# Altium PCB EDA-03517-V1-0_misc1.pcbdoc
Units mm, origin at the board's own origin, x right, y up, seen from the top; angles counter-clockwise.
Board outline 144 x 132 mm, 2 copper layers (Top Layer, Bottom Layer), stack 2.47 mm thick; 135 components, 0 nets, 152 pads, 0 vias.
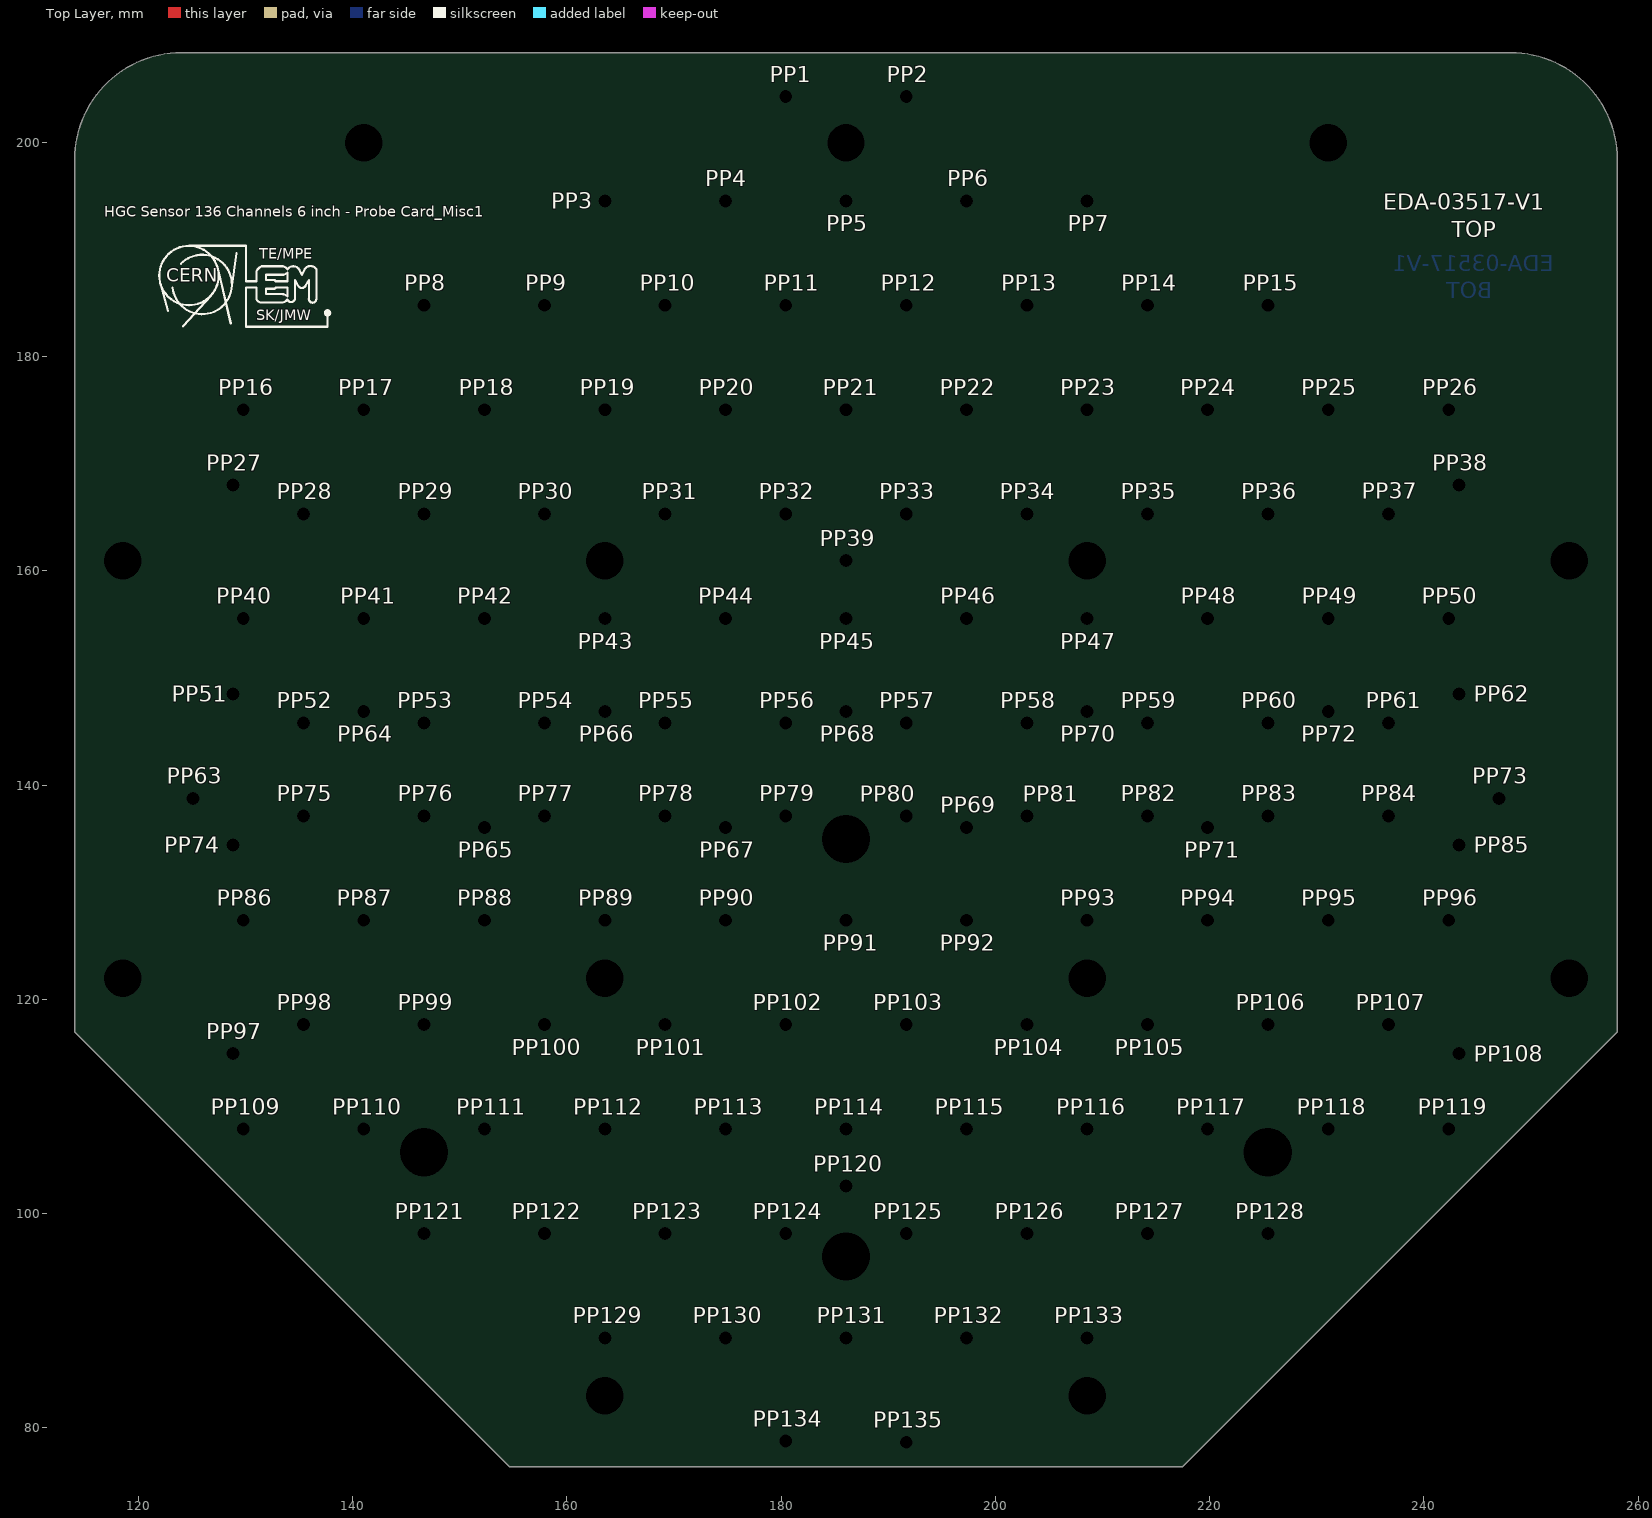
[diagram p0: Top Layer view]
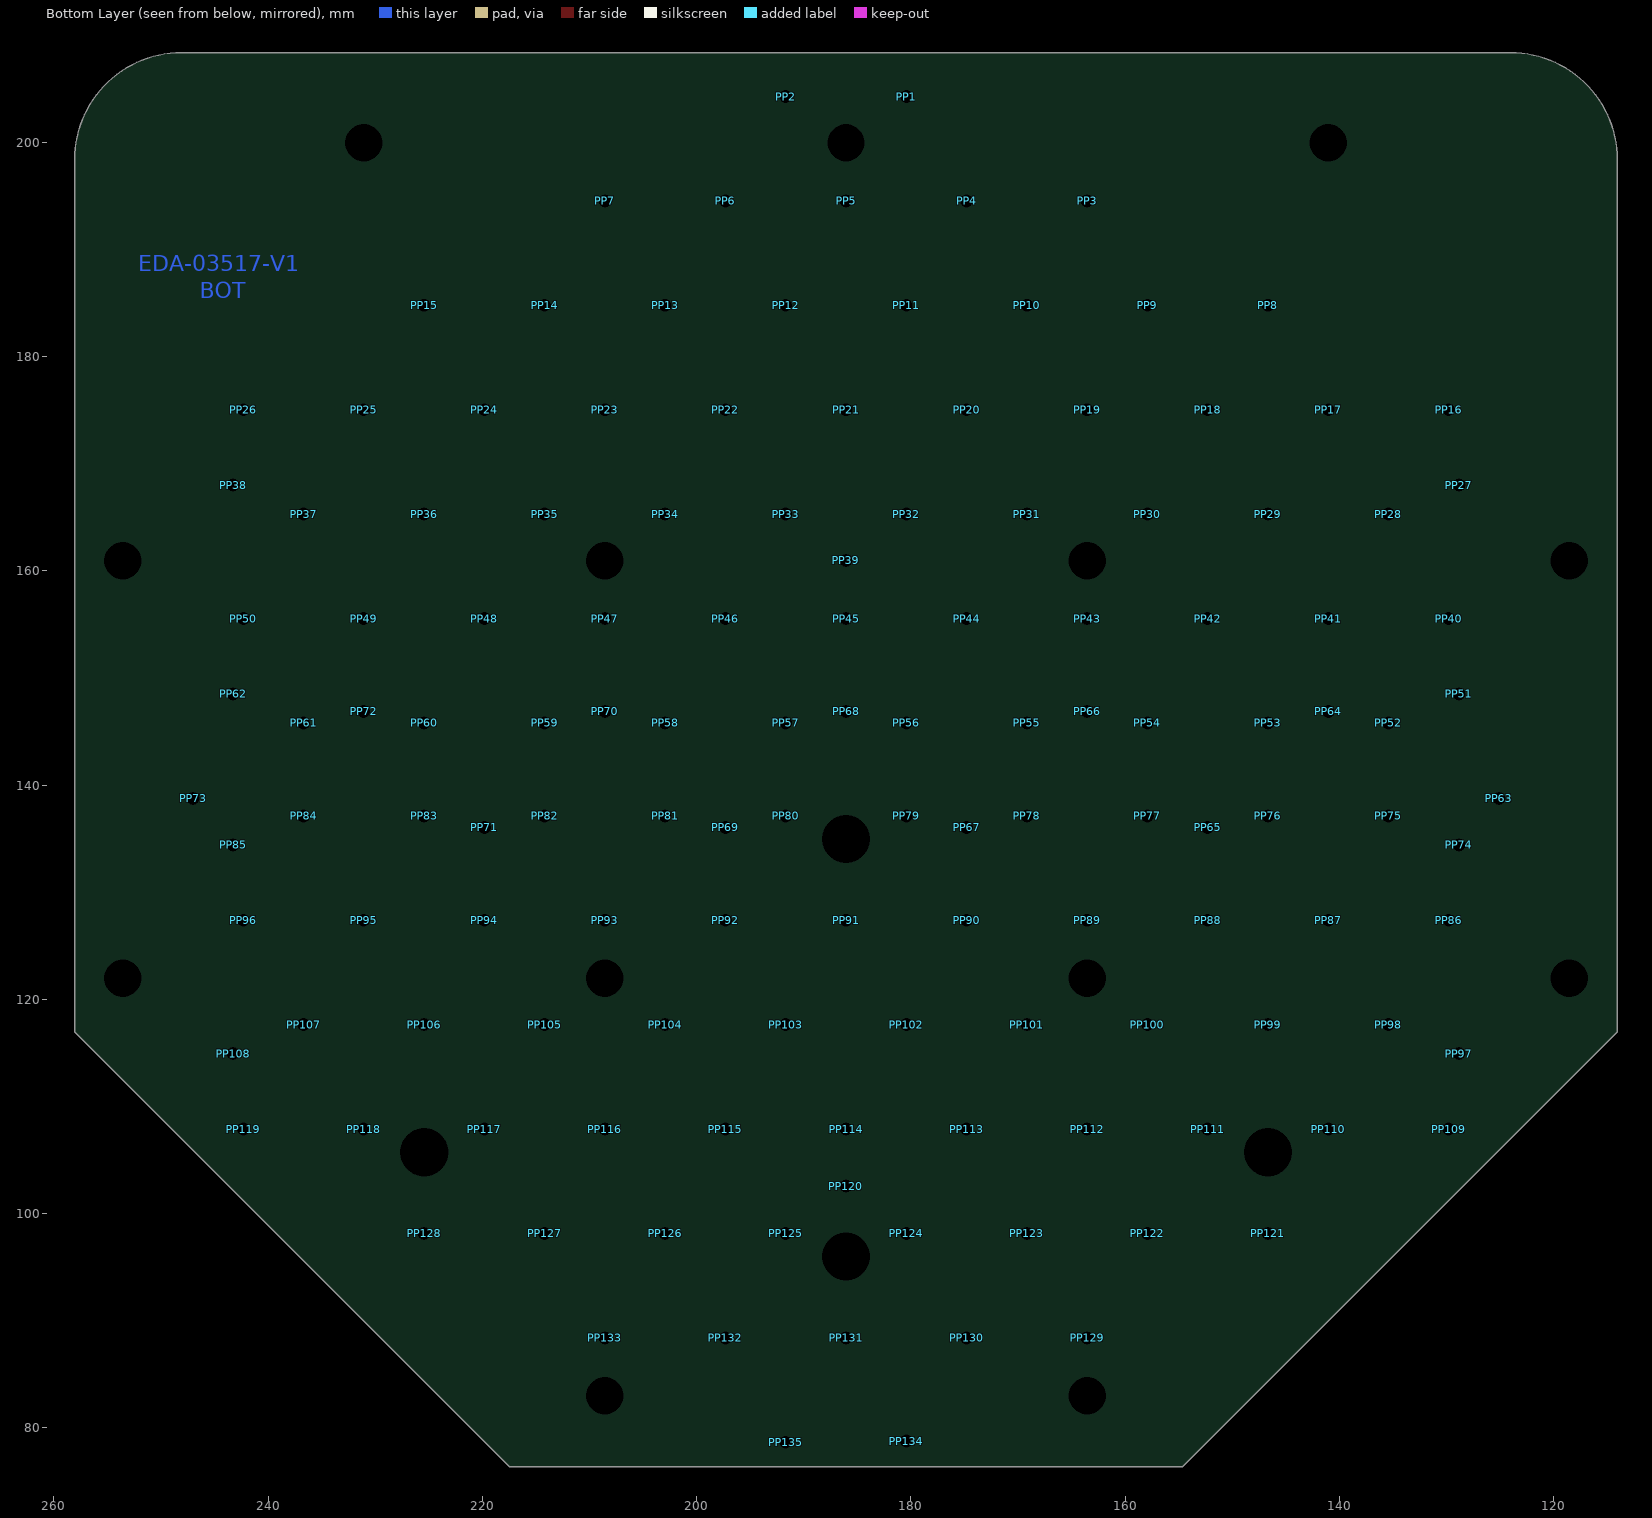
[diagram p1: Bottom Layer view, seen from below]

## Layer stack, top to bottom
Top Solder: solder mask 0.01, Solder Resist, Dk 3.5
Top Layer: signal copper 0.035
Dielectric 1: core 2.4, FR-4, Dk 4.5
Bottom Layer: signal copper 0.035
Bottom Solder: solder mask 0.01, Solder Resist, Dk 3.5

## Board outline
114.055,116.96 114.055,198.36 cw(c124.055,198.36) 124.055,208.36 248.055,208.36 cw(c248.055,198.36) 258.055,198.36 258.055,116.96 217.455,76.36 154.655,76.36

## Design rules (kind name [scope] priority, off if disabled: settings)
Clearance [All] p1: gap=0.3 ignorepadtopadclearanceinfootprint=FALSE
ComponentClearance ComponentClearance_Overlapping [InComponentClass('Overlapping') or InComponentClass('NotMounted') vs InComponentClass('Overlapping')] p1: gap=0 collisioncheckmode=3 verticalgap=0 showdistances=FALSE
ComponentClearance [not InComponentClass('Overlapping')] p2: gap=0.2 collisioncheckmode=3 verticalgap=0.2 showdistances=FALSE
DiffPairsRouting [All] p1: maxlimit=0.457 minlimit=0.457 mostfreqgap=0.457 toplayer_minwidth=0.229 toplayer_maxwidth=0.229 toplayer_prefwidth=0.229 bottomlayer_minwidth=0.229 bottomlayer_maxwidth=0.229 bottomlayer_prefwidth=0.229 maxuncoupledlength=2.54
FabricationTestPointUsage TestPointUsage [All] p1: valid=0 allowmultiple=FALSE
FabricationTestpoint Testpoint [All] p1: side=3 testpointundercomponent=TRUE minsize=1.016 maxsize=2.54 preferedsize=1.524 minholesize=0 maxholesize=1.016 preferedholesize=0.813 testpointgrid=0.025 allowsidetop=TRUE allowsidebottom=TRUE usegrid=TRUE gridtolerance=0
Height [All] p1: minheight=0 maxheight=25 prefheight=10
HoleSize [All] p1: absolutevalues=TRUE maxlimit=5 minlimit=0.4 maxpercent=80.000 minpercent=20.000
HoleToHoleClearance [All] p1: gap=0.2 allowstackedmicrovias=TRUE
MinimumSolderMaskSliver [All] p1: minsoldermaskwidth=0.35
PermittedLayers [All] p1: toplayerpermitted=TRUE bottomlayerpermitted=FALSE
PlaneClearance [All] p1: clearance=0.5
PlaneConnect PlaneConnect_Direct [InPadClass('Mounting') or IsVia] p1: planeconnectstyle=Direct reliefexpansion=0.508 reliefentries=4 reliefconductorwidth=0.254 reliefairgap=0.254
PlaneConnect [All] p2: planeconnectstyle=Relief reliefexpansion=0.3 reliefentries=4 reliefconductorwidth=0.5 reliefairgap=0.2
PolygonConnect PolygonConnect_Direct [InPadClass('Mounting') or IsVia] p1: connectstyle=Direct reliefconductorwidth=0.254 reliefentries=4 polygonreliefangle="90 Angle" airgapwidth=0.254
PolygonConnect [All] p2: connectstyle=Relief reliefconductorwidth=0.5 reliefentries=4 polygonreliefangle="90 Angle" airgapwidth=0.2
RoomDefinition ProbeCard_misc1 [InComponentClass('ProbeCard_misc1')] p1: confinementstyle=ConfineIn formatcopy=TRUE lockcomponents=FALSE outline 123.825,77.47 248.285,77.47 248.285,205.105 123.825,205.105
RoutingVias RoutingVias_NoNet [Not IsElectrical] p1: holewidth=0 width=0 viastyle="Through Hole" minholewidth=0 minwidth=0 maxholewidth=0 maxwidth=0
RoutingVias [All] p2: holewidth=0.5 width=1 viastyle="Through Hole" minholewidth=0.5 minwidth=1 maxholewidth=0.5 maxwidth=1
ShortCircuit ShortCircuit_NetTie [InNet('GND') vs InNet('VSS')or InNet('CGND')] p1: allowed=TRUE
ShortCircuit [All] p2: allowed=FALSE
SilkToSilkClearance [All] p1: silktosilkclearance=0.2
SilkToSolderMaskClearance SilkToSolderMaskClearanceVias [IsVia vs IsText] p1: minsilkscreentomaskgap=0 clearancetoexposedcopper=TRUE
SilkToSolderMaskClearance SilkscreenOverComponentPads [IsPad] p2: minsilkscreentomaskgap=0.225 clearancetoexposedcopper=TRUE
SolderMaskExpansion [All] p1: expansion=0
ViasUnderSMD [Not HasFootprint('Net Tie')] p1: allowed=FALSE
Width [All] p1: maxlimit=2.54 minlimit=0.305 preferedwidth=0.305
17 further rules are at their usual default settings.

## Classes and differential pairs
pad class Mounting: Free-D350NP Free-P450NP

## Components (designator, comment, footprint, x,y, rotation, side; value= is the part's Value field where it differs from the comment)
PP1 "Non Plated Hole" MTG120 180.429,204.261 r0 bottom
PP2 "Non Plated Hole" MTG120 191.681,204.261 r0 bottom
PP3 "Non Plated Hole" MTG120 163.551,194.516 r0 bottom
PP4 "Non Plated Hole" MTG120 174.803,194.516 r0 bottom
PP5 "Non Plated Hole" MTG120 186.055,194.516 r0 bottom
PP6 "Non Plated Hole" MTG120 197.307,194.516 r0 bottom
PP7 "Non Plated Hole" MTG120 208.559,194.516 r0 bottom
PP8 "Non Plated Hole" MTG120 146.673,184.772 r0 bottom
PP9 "Non Plated Hole" MTG120 157.925,184.772 r0 bottom
PP10 "Non Plated Hole" MTG120 169.177,184.772 r0 bottom
PP11 "Non Plated Hole" MTG120 180.429,184.772 r0 bottom
PP12 "Non Plated Hole" MTG120 191.681,184.772 r0 bottom
PP13 "Non Plated Hole" MTG120 202.933,184.772 r0 bottom
PP14 "Non Plated Hole" MTG120 214.185,184.772 r0 bottom
PP15 "Non Plated Hole" MTG120 225.437,184.772 r0 bottom
PP16 "Non Plated Hole" MTG120 129.795,175.027 r0 bottom
PP17 "Non Plated Hole" MTG120 141.047,175.027 r0 bottom
PP18 "Non Plated Hole" MTG120 152.299,175.027 r0 bottom
PP19 "Non Plated Hole" MTG120 163.551,175.027 r0 bottom
PP20 "Non Plated Hole" MTG120 174.803,175.027 r0 bottom
PP21 "Non Plated Hole" MTG120 186.055,175.027 r0 bottom
PP22 "Non Plated Hole" MTG120 197.307,175.027 r0 bottom
PP23 "Non Plated Hole" MTG120 208.559,175.027 r0 bottom
PP24 "Non Plated Hole" MTG120 219.811,175.027 r0 bottom
PP25 "Non Plated Hole" MTG120 231.063,175.027 r0 bottom
PP26 "Non Plated Hole" MTG120 242.315,175.027 r0 bottom
PP27 "Non Plated Hole" MTG120 128.852,167.986 r0 bottom
PP28 "Non Plated Hole" MTG120 135.421,165.283 r0 bottom
PP29 "Non Plated Hole" MTG120 146.673,165.283 r0 bottom
PP30 "Non Plated Hole" MTG120 157.925,165.283 r0 bottom
PP31 "Non Plated Hole" MTG120 169.177,165.283 r0 bottom
PP32 "Non Plated Hole" MTG120 180.429,165.283 r0 bottom
PP33 "Non Plated Hole" MTG120 191.681,165.283 r0 bottom
PP34 "Non Plated Hole" MTG120 202.933,165.283 r0 bottom
PP35 "Non Plated Hole" MTG120 214.185,165.283 r0 bottom
PP36 "Non Plated Hole" MTG120 225.437,165.283 r0 bottom
PP37 "Non Plated Hole" MTG120 236.689,165.283 r0 bottom
PP38 "Non Plated Hole" MTG120 243.258,167.986 r0 bottom
PP39 "Non Plated Hole" MTG120 186.055,160.96 r0 bottom
PP40 "Non Plated Hole" MTG120 129.795,155.538 r0 bottom
PP41 "Non Plated Hole" MTG120 141.047,155.538 r0 bottom
PP42 "Non Plated Hole" MTG120 152.299,155.538 r0 bottom
PP43 "Non Plated Hole" MTG120 163.551,155.538 r0 bottom
PP44 "Non Plated Hole" MTG120 174.803,155.538 r0 bottom
PP45 "Non Plated Hole" MTG120 186.055,155.538 r0 bottom
PP46 "Non Plated Hole" MTG120 197.307,155.538 r0 bottom
PP47 "Non Plated Hole" MTG120 208.559,155.538 r0 bottom
PP48 "Non Plated Hole" MTG120 219.811,155.538 r0 bottom
PP49 "Non Plated Hole" MTG120 231.063,155.538 r0 bottom
PP50 "Non Plated Hole" MTG120 242.315,155.538 r0 bottom
PP51 "Non Plated Hole" MTG120 128.852,148.497 r0 bottom
PP52 "Non Plated Hole" MTG120 135.421,145.794 r0 bottom
PP53 "Non Plated Hole" MTG120 146.673,145.794 r0 bottom
PP54 "Non Plated Hole" MTG120 157.925,145.794 r0 bottom
PP55 "Non Plated Hole" MTG120 169.177,145.794 r0 bottom
PP56 "Non Plated Hole" MTG120 180.429,145.794 r0 bottom
PP57 "Non Plated Hole" MTG120 191.681,145.794 r0 bottom
PP58 "Non Plated Hole" MTG120 202.933,145.794 r0 bottom
PP59 "Non Plated Hole" MTG120 214.185,145.794 r0 bottom
PP60 "Non Plated Hole" MTG120 225.437,145.794 r0 bottom
PP61 "Non Plated Hole" MTG120 236.689,145.794 r0 bottom
PP62 "Non Plated Hole" MTG120 243.258,148.497 r0 bottom
PP63 "Non Plated Hole" MTG120 125.112,138.753 r0 bottom
PP64 "Non Plated Hole" MTG120 141.047,146.864 r0 bottom
PP65 "Non Plated Hole" MTG120 152.299,136.049 r0 bottom
PP66 "Non Plated Hole" MTG120 163.551,146.864 r0 bottom
PP67 "Non Plated Hole" MTG120 174.803,136.049 r0 bottom
PP68 "Non Plated Hole" MTG120 186.055,146.864 r0 bottom
PP69 "Non Plated Hole" MTG120 197.307,136.049 r0 bottom
PP70 "Non Plated Hole" MTG120 208.559,146.864 r0 bottom
PP71 "Non Plated Hole" MTG120 219.811,136.049 r0 bottom
PP72 "Non Plated Hole" MTG120 231.063,146.864 r0 bottom
PP73 "Non Plated Hole" MTG120 246.998,138.753 r0 bottom
PP74 "Non Plated Hole" MTG120 128.852,134.415 r0 bottom
PP75 "Non Plated Hole" MTG120 135.421,137.119 r0 bottom
PP76 "Non Plated Hole" MTG120 146.673,137.119 r0 bottom
PP77 "Non Plated Hole" MTG120 157.925,137.119 r0 bottom
PP78 "Non Plated Hole" MTG120 169.177,137.119 r0 bottom
PP79 "Non Plated Hole" MTG120 180.429,137.119 r0 bottom
PP80 "Non Plated Hole" MTG120 191.681,137.119 r0 bottom
PP81 "Non Plated Hole" MTG120 202.933,137.119 r0 bottom
PP82 "Non Plated Hole" MTG120 214.185,137.119 r0 bottom
PP83 "Non Plated Hole" MTG120 225.437,137.119 r0 bottom
PP84 "Non Plated Hole" MTG120 236.689,137.119 r0 bottom
PP85 "Non Plated Hole" MTG120 243.258,134.415 r0 bottom
PP86 "Non Plated Hole" MTG120 129.795,127.375 r0 bottom
PP87 "Non Plated Hole" MTG120 141.047,127.375 r0 bottom
PP88 "Non Plated Hole" MTG120 152.299,127.375 r0 bottom
PP89 "Non Plated Hole" MTG120 163.551,127.375 r0 bottom
PP90 "Non Plated Hole" MTG120 174.803,127.375 r0 bottom
PP91 "Non Plated Hole" MTG120 186.055,127.375 r0 bottom
PP92 "Non Plated Hole" MTG120 197.307,127.375 r0 bottom
PP93 "Non Plated Hole" MTG120 208.559,127.375 r0 bottom
PP94 "Non Plated Hole" MTG120 219.811,127.375 r0 bottom
PP95 "Non Plated Hole" MTG120 231.063,127.375 r0 bottom
PP96 "Non Plated Hole" MTG120 242.315,127.375 r0 bottom
PP97 "Non Plated Hole" MTG120 128.852,114.926 r0 bottom
PP98 "Non Plated Hole" MTG120 135.421,117.63 r0 bottom
PP99 "Non Plated Hole" MTG120 146.673,117.63 r0 bottom
PP100 "Non Plated Hole" MTG120 157.925,117.63 r0 bottom
PP101 "Non Plated Hole" MTG120 169.177,117.63 r0 bottom
PP102 "Non Plated Hole" MTG120 180.429,117.63 r0 bottom
PP103 "Non Plated Hole" MTG120 191.681,117.63 r0 bottom
PP104 "Non Plated Hole" MTG120 202.933,117.63 r0 bottom
PP105 "Non Plated Hole" MTG120 214.185,117.63 r0 bottom
PP106 "Non Plated Hole" MTG120 225.437,117.63 r0 bottom
PP107 "Non Plated Hole" MTG120 236.689,117.63 r0 bottom
PP108 "Non Plated Hole" MTG120 243.258,114.926 r0 bottom
PP109 "Non Plated Hole" MTG120 129.795,107.886 r0 bottom
PP110 "Non Plated Hole" MTG120 141.047,107.886 r0 bottom
PP111 "Non Plated Hole" MTG120 152.299,107.886 r0 bottom
PP112 "Non Plated Hole" MTG120 163.551,107.886 r0 bottom
PP113 "Non Plated Hole" MTG120 174.803,107.886 r0 bottom
PP114 "Non Plated Hole" MTG120 186.055,107.886 r0 bottom
PP115 "Non Plated Hole" MTG120 197.307,107.886 r0 bottom
PP116 "Non Plated Hole" MTG120 208.559,107.886 r0 bottom
PP117 "Non Plated Hole" MTG120 219.811,107.886 r0 bottom
PP118 "Non Plated Hole" MTG120 231.063,107.886 r0 bottom
PP119 "Non Plated Hole" MTG120 242.315,107.886 r0 bottom
PP120 "Non Plated Hole" MTG120 186.055,102.56 r0 bottom
PP121 "Non Plated Hole" MTG120 146.673,98.141 r0 bottom
PP122 "Non Plated Hole" MTG120 157.925,98.141 r0 bottom
PP123 "Non Plated Hole" MTG120 169.177,98.141 r0 bottom
PP124 "Non Plated Hole" MTG120 180.429,98.141 r0 bottom
PP125 "Non Plated Hole" MTG120 191.681,98.141 r0 bottom
PP126 "Non Plated Hole" MTG120 202.933,98.141 r0 bottom
PP127 "Non Plated Hole" MTG120 214.185,98.141 r0 bottom
PP128 "Non Plated Hole" MTG120 225.437,98.141 r0 bottom
PP129 "Non Plated Hole" MTG120 163.551,88.397 r0 bottom
PP130 "Non Plated Hole" MTG120 174.803,88.397 r0 bottom
PP131 "Non Plated Hole" MTG120 186.055,88.397 r0 bottom
PP132 "Non Plated Hole" MTG120 197.307,88.397 r0 bottom
PP133 "Non Plated Hole" MTG120 208.559,88.397 r0 bottom
PP134 "Non Plated Hole" MTG120 180.435,78.76 r0 bottom
PP135 "Non Plated Hole" MTG120 191.681,78.652 r0 bottom

## Footprints (in the part's own frame and the unit in brackets; to place one, negate y for a bottom-side part, rotate by r counter-clockwise, add the part's x,y. Pads: shape width x height; smd on the part's side, far side on the other; paste and mask are expansions set on the pad)
MTG120 [mm] "Non Plated Through Hole: Hole Dia.=1.2mm"
  round 0.5 hole 1.2 unplated mask+0.35: 1(0,0)

## Part data
PP1 PP2 PP3 PP4 PP5 PP6 PP7 PP8 PP9 PP10 PP11 PP12 PP13 PP14 PP15 PP16 PP17 PP18 PP19 PP20 PP21 PP22 PP23 PP24 PP25 PP26 PP27 PP28 PP29 PP30 PP31 PP32 PP33 PP34 PP35 PP36 PP37 PP38 PP39 PP40 PP41 PP42 PP43 PP44 PP45 PP46 PP47 PP48 PP49 PP50 PP51 PP52 PP53 PP54 PP55 PP56 PP57 PP58 PP59 PP60 PP61 PP62 PP63 PP64 PP65 PP66 PP67 PP68 PP69 PP70 PP71 PP72 PP73 PP74 PP75 PP76 PP77 PP78 PP79 PP80 PP81 PP82 PP83 PP84 PP85 PP86 PP87 PP88 PP89 PP90 PP91 PP92 PP93 PP94 PP95 PP96 PP97 PP98 PP99 PP100 PP101 PP102 PP103 PP104 PP105 PP106 PP107 PP108 PP109 PP110 PP111 PP112 PP113 PP114 PP115 PP116 PP117 PP118 PP119 PP120 PP121 PP122 PP123 PP124 PP125 PP126 PP127 PP128 PP129 PP130 PP131 PP132 PP133 PP134 PP135: library part NON-PLATED_HOLE1.2, "Single Terminal Socket", Author="CERN DEM JMW", ComponentHeight=0mm, Component Type="Standard (No BOM)", CreateDate=28/11/2016, Family="Non Plated Hole", HelpURL=Undefined, LatestRevisionDate=28/11/2016, Mounted=No, PackageDescription="Non Plated Through Hole: Hole Dia.=1.2mm", Part Description="Non Plated Through Hole: Hole Dia.=1.2mm", Part Number=NON-PLATED_HOLE1.2, Pin Count=1, Sense=No, SMD=No, Socket=No, Status=None

## Free pads (board coordinates)
  round 1 hole 3.5 unplated mask+1.25: D350NP(118.543,121.967) D350NP(118.543,160.945) D350NP(141.047,199.923) D350NP(163.551,82.989) D350NP(163.551,121.967) D350NP(163.551,160.945) D350NP(186.055,199.923) D350NP(208.559,82.989) D350NP(208.559,121.967) D350NP(208.559,160.945) D350NP(231.063,199.923) D350NP(253.567,121.967) D350NP(253.567,160.945)
  round 1 hole 4.5 unplated mask+1.75: P450NP(146.673,105.726) P450NP(186.055,95.982) P450NP(186.055,134.96) P450NP(225.425,105.726)

## Nets (pads, with @x,y where several pads share a name; then routed paths per layer and width w, separated by ;. In a path a pad name is that pad's centre, name@x,y a point inside that pad or via, vN(x,y) a via of type N, cw(c..) or ccw(c..) an arc to the next point about the centre after c; other vN are vias at no path point)
pads on no net: PP1.1 PP2.1 PP3.1 PP4.1 PP5.1 PP6.1 PP7.1 PP8.1 PP9.1 PP10.1 PP11.1 PP12.1 PP13.1 PP14.1 PP15.1 PP16.1 PP17.1 PP18.1 PP19.1 PP20.1 PP21.1 PP22.1 PP23.1 PP24.1 PP25.1 PP26.1 PP27.1 PP28.1 PP29.1 PP30.1 PP31.1 PP32.1 PP33.1 PP34.1 PP35.1 PP36.1 PP37.1 PP38.1 PP39.1 PP40.1 PP41.1 PP42.1 PP43.1 PP44.1 PP45.1 PP46.1 PP47.1 PP48.1 PP49.1 PP50.1 PP51.1 PP52.1 PP53.1 PP54.1 PP55.1 PP56.1 PP57.1 PP58.1 PP59.1 PP60.1 PP61.1 PP62.1 PP63.1 PP64.1 PP65.1 PP66.1 PP67.1 PP68.1 PP69.1 PP70.1 PP71.1 PP72.1 PP73.1 PP74.1 PP75.1 PP76.1 PP77.1 PP78.1 PP79.1 PP80.1 PP81.1 PP82.1 PP83.1 PP84.1 PP85.1 PP86.1 PP87.1 PP88.1 PP89.1 PP90.1 PP91.1 PP92.1 PP93.1 PP94.1 PP95.1 PP96.1 PP97.1 PP98.1 PP99.1 PP100.1 PP101.1 PP102.1 PP103.1 PP104.1 PP105.1 PP106.1 PP107.1 PP108.1 PP109.1 PP110.1 PP111.1 PP112.1 PP113.1 PP114.1 PP115.1 PP116.1 PP117.1 PP118.1 PP119.1 PP120.1 PP121.1 PP122.1 PP123.1 PP124.1 PP125.1 PP126.1 PP127.1 PP128.1 PP129.1 PP130.1 PP131.1 PP132.1 PP133.1 PP134.1 PP135.1

## Other copper
Bottom Layer:
  text "EDA-03517-V1" at 252.095,187.96 h1.5
  text "BOT" at 246.38,185.42 h1.5
  text ".Layer_Name" at 204.47,64.135 h1.91 r45
  text "2" at 190.817,46.99 h2.54

## Silkscreen, mask and mechanical layers (free items; w line width, h text height)
Top Overlay:
  circle w0.203: c124.729,187.55 r2.775
  circle w0.3: c137.662,184.065 r0.2
  lines w0.2: 131.02,185.42 131.02,186.42 ; 131.02,187.02 131.02,187.92
  lines w0.203: 122.057,186.804 122.775,184.232 ; 123.2,186.448 ccw(c125.96,186.716) 123.978,188.656 ; 124.175,182.825 126.779,185.681 ; 124.729,190.325 130.042,190.325 130.042,187.02 131.02,187.02 ; 127.431,188.181 128.625,183.07 ; 128.706,186.325 129.178,189.638 ; 130.042,186.42 130.042,182.765 137.662,182.765 137.662,184.065 ; 130.055,186.42 131.02,186.42 ; 131.02,185.42 ccw(c131.52,185.532) 131.52,185.02 133.42,185.02 ccw(c133.352,185.699) 133.92,185.32 ccw(c134.262,185.428) 134.62,185.42 134.62,187.12 134.92,186.62 ccw(c135.27,186.76) 135.62,186.62 135.92,187.12 135.92,185.42 ccw(c136.27,185.37) 136.62,185.42 136.62,188.12 ccw(c136.07,187.813) 135.52,188.12 135.27,187.62 135.02,188.12 ccw(c134.47,187.753) 133.92,188.12 ccw(c133.42,187.853) 133.42,188.42 131.52,188.42 ccw(c131.853,187.587) 131.02,187.92 ; 133.42,185.82 131.92,185.82 131.92,186.32 132.62,186.32 ccw(c132.653,186.503) 132.82,186.42 133.92,186.42 133.92,185.62 ccw(c133.4,185.046) 133.421,185.82 ; 131.92,187.12 132.62,187.12 cw(c132.653,186.937) 132.82,187.02 133.92,187.02 133.92,187.82 cw(c133.42,188.345) 133.42,187.62 131.92,187.62 131.92,187.12
  text "EDA-03517-V1" at 236.22,193.675 h1.5
  text "HGC Sensor 136 Channels 6 inch - Probe Card_Misc1" at 116.84,193.04 h1
  text "TOP" at 242.57,191.135 h1.5
  text "TE/MPE" at 131.312,189.115 h1
  text "CERN" at 122.613,186.956 h1.25
  text "SK/JMW" at 130.995,183.4 h1
  text ".Layer_Name" at 210.82,60.96 h1.91
Bottom Overlay:
  text ".Layer_Name" at 256.54,60.96 h1.91
Top Paste:
  text ".Layer_Name" at 210.82,55.88 h1.91
Bottom Paste:
  text ".Layer_Name" at 256.54,55.88 h1.91
Top Solder:
  text ".Layer_Name" at 210.82,58.42 h1.91
Bottom Solder:
  text ".Layer_Name" at 256.54,58.42 h1.91
Mechanical 1:
  the board outline again, w1.27
Mechanical 2:
  text "Components" at 233.68,60.96 h1.91
  text ".Component_Count" at 251.46,60.96 h1.91
  text "Pins" at 233.68,58.42 h1.91
  text ".Pad_Count" at 251.46,58.42 h1.91
  text "Vias" at 233.68,55.88 h1.91
  text ".Via_Count" at 251.46,55.88 h1.91
  text "Holes" at 233.68,53.34 h1.91
  text ".Hole_Count" at 251.46,53.34 h1.91
  text "Nets" at 233.68,50.8 h1.91
  text ".Net_Count" at 251.46,50.8 h1.91
Corners:
  lines w0.2: 109.055,76.36 114.055,76.36 ; 109.055,208.36 114.055,208.36 ; 114.055,71.36 114.055,76.36 ; 114.055,116.96 114.055,76.36 ; 114.055,198.36 114.055,208.36 ; 114.055,213.36 114.055,208.36 ; 124.055,208.36 114.055,208.36 ; 154.655,76.36 114.055,76.36 ; 217.455,76.36 258.055,76.36 ; 248.055,208.36 258.055,208.36 ; 258.055,71.36 258.055,76.36 ; 258.055,116.96 258.055,76.36 ; 258.055,198.36 258.055,208.36 ; 258.055,213.36 258.055,208.36 ; 263.055,76.36 258.055,76.36 ; 263.055,208.36 258.055,208.36
  lines w0.254: 189.23,45.72 189.23,50.8 ; 184.15,45.72 194.31,45.72 194.31,50.8 184.15,50.8 184.15,45.72
Title Block:
  circle w0.305: c118.745,58.42 r3.81
  lines w0.254: 116.84,57.158 ccw(c121.285,57.15) 117.553,59.564 ; 125.73,57.15 125.73,61.595 ; 128.27,53.975 175.26,53.975 ; 128.27,57.15 175.26,57.15 ; 128.27,60.325 175.26,60.325 ; 142.24,50.8 142.24,63.5 ; 114.3,50.8 127,50.8 127,63.5 114.3,63.5 114.3,50.8 ; 128.27,50.8 175.26,50.8 175.26,63.5 128.27,63.5 128.27,50.8
  lines w0.305: 115.189,57.048 116.205,53.975 ; 118.237,50.927 121.31,55.601 ; 118.745,62.23 126.365,62.865 ; 122.479,59.182 125.095,50.8
  text "Number" at 129.54,60.96 h1.91
  text "EDA-03517-V1_misc1" at 143.51,60.96 h1.91
  text "Drawn By" at 129.54,57.785 h1.91
  text "JMW" at 143.51,57.785 h1.91
  text "CERN" at 115.57,57.531 h2.54
  text "DATE" at 129.54,54.61 h1.91
  text "28-11-2016" at 143.51,54.61 h1.91
  text "MOD." at 129.54,51.435 h1.91
  text "-" at 143.51,51.435 h1.91
  text "Print Date" at 129.54,48.26 h1.27
  text ".Print_Date" at 144.78,48.26 h1.27
  text ".Print_Time" at 157.48,48.26 h1.27
  text ".Print_Scale" at 129.54,45.72 h1.27
Notvisible:
  lines w0.254: 184.15,52.07 194.31,52.07 ; 187.325,52.07 194.945,59.69 ; 192.405,52.07 200.025,59.69
  text "EDA-03517-V1" at 236.22,187.96 h1.5
  text "TOP" at 242.57,185.42 h1.5
  text ".Layer_Name" at 187.325,52.07 h1.91 r45
  text "1" at 186.373,46.99 h2.54
Drill Drawing:
  circle w0.25: c116.878,239.518 r0.833
  circle w0.2: c163.551,121.967 r3.15
  circle w0.2: c208.559,121.967 r3.15
  circle w0.2: c208.559,160.945 r3.15
  circle w0.2: c163.551,160.945 r3.15
  circle w0.2: c186.055,199.923 r3.15
  circle w0.2: c231.063,199.923 r3.15
  circle w0.2: c253.567,160.945 r3.15
  circle w0.2: c253.567,121.967 r3.15
  circle w0.2: c208.559,82.989 r3.15
  circle w0.2: c163.551,82.989 r3.15
  circle w0.2: c118.543,121.967 r3.15
  circle w0.2: c118.543,160.945 r3.15
  circle w0.2: c141.047,199.923 r3.15
  lines w0.1: 227.33,233.68 231.14,233.68 ; 227.33,236.22 242.57,236.22 ; 228.6,223.52 228.6,238.76 ; 231.775,236.855 234.95,233.68 ; 232.41,238.76 237.49,233.68 ; 234.95,238.76 240.03,233.68 ; 236.855,229.235 240.665,233.045 ; 237.49,238.76 241.935,234.315 ; 240.03,238.76 243.205,235.585 ; 241.3,242.57 251.46,242.57 ; 242.57,238.76 243.84,237.49 ; 243.84,239.395 243.84,243.84 ; 246.38,233.045 246.38,239.395 ; 248.92,238.125 253.365,233.68 ; 248.92,239.395 248.92,243.84 ; 250.825,238.76 255.905,233.68 ; 252.095,233.045 255.905,229.235 ; 253.365,238.76 258.445,233.68 ; 255.905,238.76 260.35,234.315 ; 258.445,238.76 261.62,235.585 ; 264.16,223.52 264.16,241.3 ; 237.802,230.182 ccw(c246.38,238.76) 254.958,230.182 ; 237.802,230.182 238.76,229.87 238.125,229.235 237.802,230.182 ; 254.958,230.182 254.635,229.235 254,229.87 254.958,230.182 ; 227.965,232.41 229.235,232.41 228.6,233.68 227.965,232.41 ; 227.965,237.49 229.235,237.49 228.6,236.22 227.965,237.49 ; 242.57,241.935 243.84,242.57 242.57,243.205 242.57,241.935 ; 248.92,242.57 250.19,241.935 250.19,243.205 248.92,242.57 ; 263.525,232.41 264.16,233.68 264.795,232.41 263.525,232.41 ; 263.525,240.03 264.16,238.76 264.795,240.03 263.525,240.03
  lines w0.25: 116.045,231.185 116.045,231.602 116.461,232.018 116.045,232.435 116.045,232.852 116.461,232.852 116.878,232.435 117.295,232.852 117.711,232.852 117.711,232.435 117.295,232.018 117.711,231.602 117.711,231.185 117.295,231.185 116.878,231.602 116.461,231.185 116.045,231.185 ; 116.045,234.935 117.711,234.935 117.711,236.602 116.045,236.602 116.045,234.935
  lines w0.35: 230.505,238.76 266.7,238.76 ; 231.775,233.68 266.7,233.68 ; 241.3,233.68 243.84,236.22 ; 243.84,238.76 243.84,236.22 ; 248.92,238.76 248.92,236.22 ; 251.46,233.68 248.92,236.22 ; 243.84,236.22 248.92,236.22
  lines w0.5: 114.55,230.06 217.078,230.06 ; 114.55,241.31 217.078,241.31 ; 127.115,226.31 127.115,245.06 ; 141.691,226.31 141.691,245.06 ; 166.885,226.31 166.885,245.06 ; 176.807,226.31 176.807,245.06 ; 189.087,226.31 189.087,245.06 ; 114.55,226.31 217.078,226.31 217.078,245.06 114.55,245.06 114.55,226.31
  text "D3.5mm" at 242.57,245.745 h1.5
  text "Symbol" at 116.8,242.435 h1.8
  text "Hit Count" at 128.24,242.435 h1.8
  text "Finished Hole Size" at 142.816,242.435 h1.8
  text "Plated" at 168.01,242.435 h1.8
  text "Via/Pad" at 177.932,242.435 h1.8
  text "Comment" at 190.212,242.435 h1.8
  text "135" at 128.24,238.685 h1.5
  text "1.20mm (47.24mil)" at 142.816,238.685 h1.5
  text "NPTH" at 168.01,238.685 h1.5
  text "Pad" at 177.932,238.685 h1.5
  text "Top" at 268.605,238.125 h1.5
  text "13" at 128.24,234.935 h1.5
  text "3.50mm (137.80mil)" at 142.816,234.935 h1.5
  text "NPTH" at 168.01,234.935 h1.5
  text "Pad" at 177.932,234.935 h1.5
  text "Milled Hole > see detail" at 190.212,234.935 h1.5
  text "Bot" at 268.605,233.045 h1.5
  text "4" at 128.24,231.185 h1.5
  text "4.50mm (177.17mil)" at 142.816,231.185 h1.5
  text "NPTH" at 168.01,231.185 h1.5
  text "Pad" at 177.932,231.185 h1.5
  text "152 Total" at 128.24,227.435 h1.5
  text "1.4mm" at 227.33,224.155 h1.5 r90
  text "90deg" at 243.84,224.155 h1.5
  text "2.4mm" at 262.89,224.155 h1.5 r90
  text "General tolerances +/-0.05mm unless otherwise stated" at 116.84,223.52 h1.5
  text "45deg" at 140.97,78.74 h1.5

## Dimensions
248.055,198.36 to 261.62,210.82 on Drill Drawing
154.655,76.36 to 118.543,121.967 on Drill Drawing
114.055,116.96 to 154.655,76.36 on Drill Drawing
114.055,198.36 to 258.055,198.36 on Mechanical 2
217.455,76.36 to 248.055,208.36 on Mechanical 2